# Altium PCB RA08B.PcbDoc
Units mm, origin at the board's own origin, x right, y up, seen from the top; angles counter-clockwise.
Board outline 43.18 x 24.13 mm, 2 copper layers (Top Layer, Bottom Layer), stack 1.021 mm thick; 22 components, 26 nets, 122 pads, 69 vias.
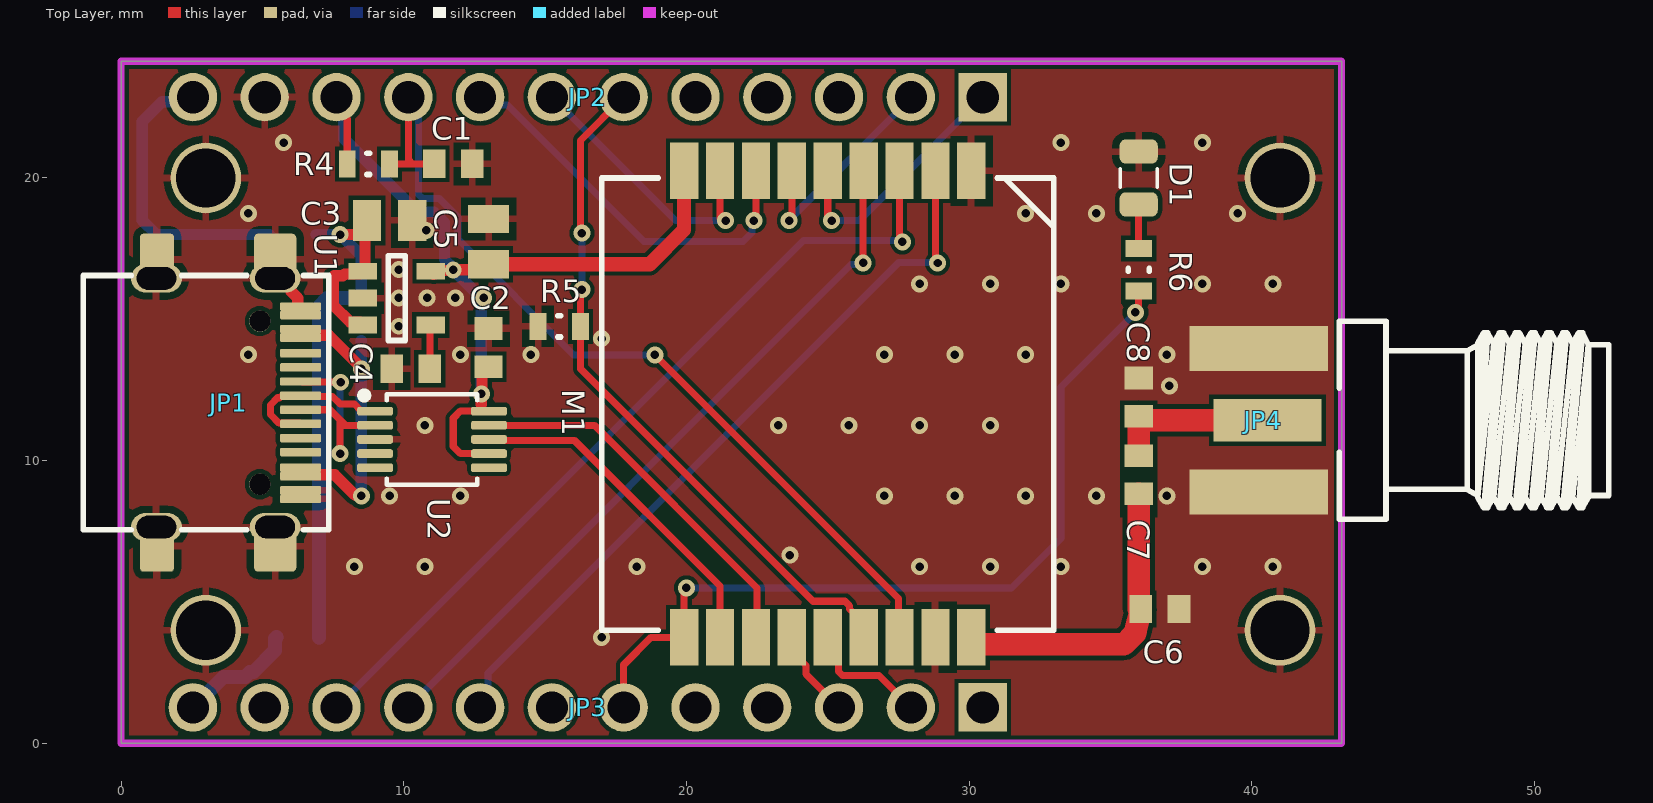
[diagram p0: Top Layer view]
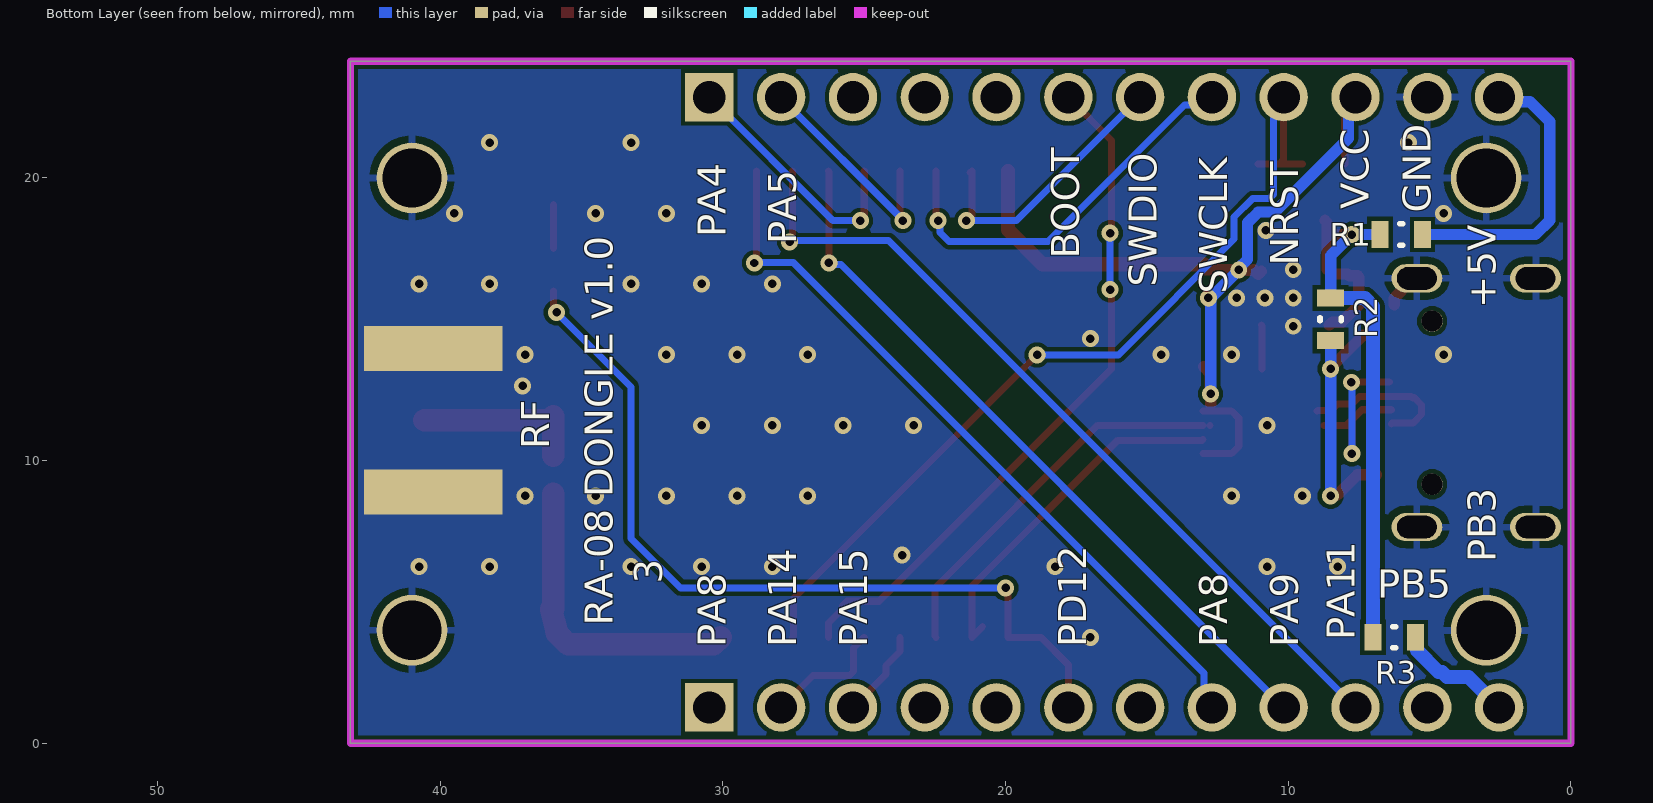
[diagram p1: Bottom Layer view, seen from below]
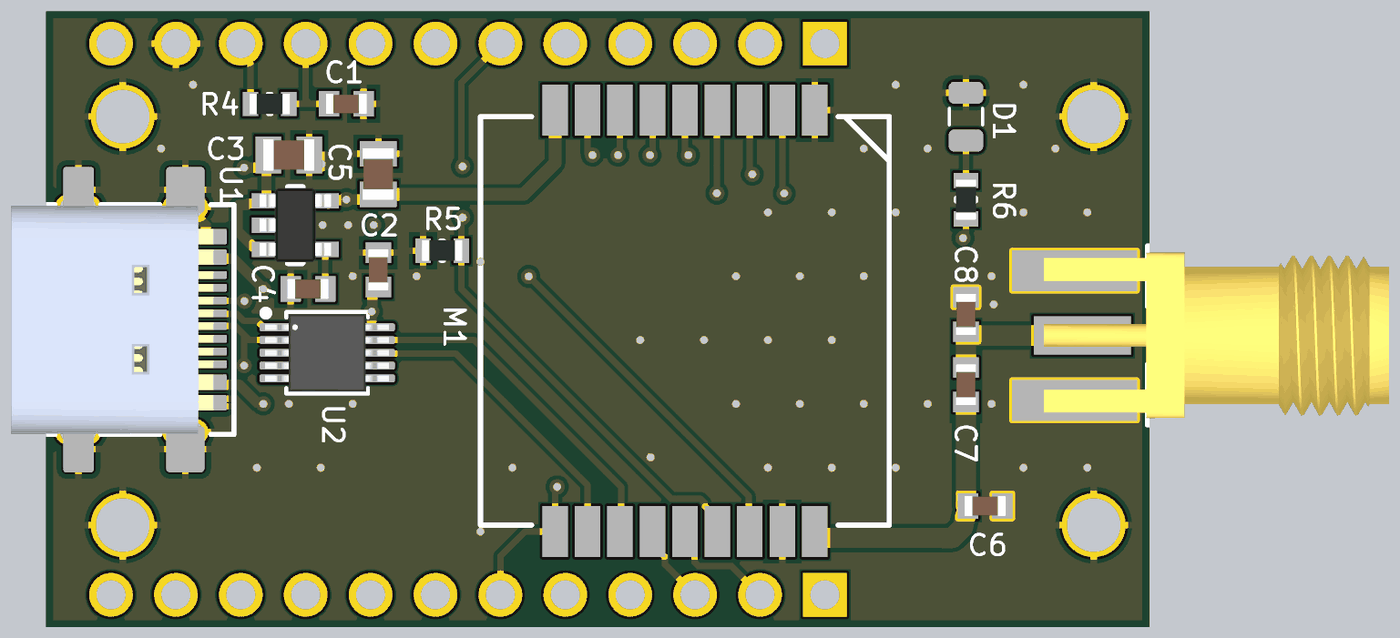
[diagram p2: 3D render of the assembled board from above, using the file's embedded part models]
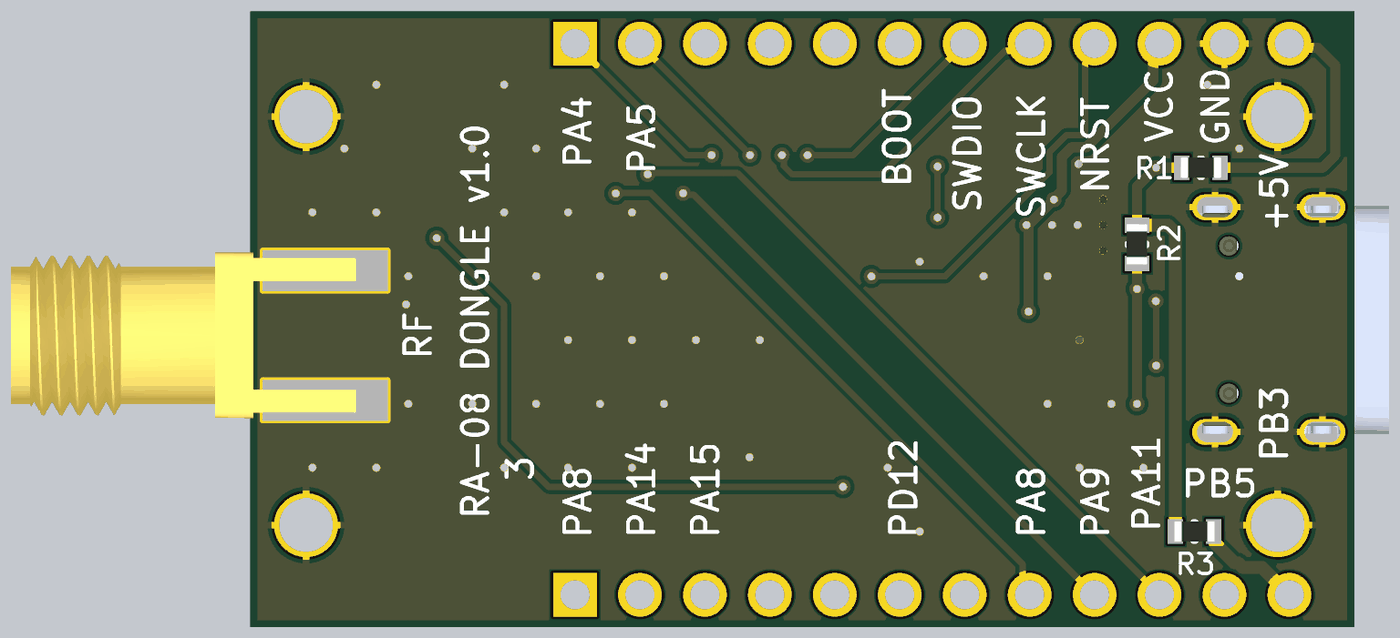
[diagram p3: 3D render of the assembled board from below, using the file's embedded part models]

## Layer stack, top to bottom
Top Solder: solder mask 0.01, Solder Resist, Dk 3.5
Top Layer: signal copper 0.0356
Dielectric 1: dielectric 0.95, FR-4, Dk 4.8
Bottom Layer: signal copper 0.0356
Bottom Solder: solder mask 0.01, Solder Resist, Dk 3.5

## Board outline
0,0 0,24.13 43.18,24.13 43.18,0

## Design rules (kind name [scope] priority, off if disabled: settings)
Clearance [All] p1: gap=0.15 ignorepadtopadclearanceinfootprint=FALSE
HoleSize [All] p1: absolutevalues=TRUE maxlimit=3 minlimit=0.025 maxpercent=80.000 minpercent=20.000
MinimumSolderMaskSliver [All] p1: minsoldermaskwidth=0.05
PolygonConnect PolygonConnect_1 [InComponent('C6') or InComponent('C8') or InComponent('JP4') vs IsNamedPolygon('GND_L01_P000') Or IsNamedPolygon('GND_L02_P001')] p1: connectstyle=Direct reliefconductorwidth=0.254 reliefentries=4 polygonreliefangle="90 Angle" airgapwidth=0.254
PolygonConnect [All] p2: thpad.connectstyle=Relief thpad.reliefconductorwidth=0.25 thpad.reliefentries=4 thpad.polygonreliefangle="90 Angle" thpad.airgapwidth=0.25 smdpad.connectstyle=Relief smdpad.reliefconductorwidth=0.25 smdpad.reliefentries=4 smdpad.polygonreliefangle="90 Angle" smdpad.airgapwidth=0.25 via.connectstyle=Direct via.reliefconductorwidth=0.254 via.reliefentries=4 via.polygonreliefangle="90 Angle" via.airgapwidth=0.254
RoutingVias [All] p1: holewidth=0.711 width=1.27 viastyle="Through Hole" minholewidth=0.711 minwidth=1.27 maxholewidth=0.711 maxwidth=1.27
SilkToSilkClearance [All] p1: silktosilkclearance=0.1
SilkToSolderMaskClearance [IsPad] p1: minsilkscreentomaskgap=0.1 clearancetoexposedcopper=TRUE
SolderMaskExpansion [All] p1: expansion=0.102 istentingtop=FALSE
Width [All] p1: maxlimit=2 minlimit=0.2 preferedwidth=0.25
26 further rules are at their usual default settings.

## Components (designator, comment, footprint, x,y, rotation, side; value= is the part's Value field where it differs from the comment)
C1 "100nF" C-0603 11.75,20.5 r180 top
C2 "100nF" C-0603 13,14 r270 top
C3 "10uF" C-0805 9.5,18.5 r0 top
C4 "nc" C-0603 10.25,13.25 r180 top
C5 "10uF" C-0805 13,17.75 r90 top
C6 "nc" C-0603 36.75,4.75 r180 top
C7 "100pF" C-0603 36,9.5 r90 top
C8 "nc" C-0603 36,12.25 r270 top
D1 "LED_1" LED_0805 36,20 r270 top
JP1 "L-KLS1-5473" USB_C_SMD_SLOT 6.35,12.05 r270 top
JP2 "HEADER 12" PLS1-12 30.48,22.86 r180 top locked
JP3 "HEADER 12" PLS1-12 30.48,1.27 r180 top locked
JP4 "EM-SA071-GGT" SMA_F_EDGE 41.825,11.43 r180 top
M1 "RA-08" LGA18_RA08 25,12 r270 top locked
R1 "0" R-0603 6,18 r0 bottom
R2 "nc" R-0603 8.5,15 r90 bottom
R3 "nc" R-0603 6.25,3.75 r180 bottom
R4 "10k" R-0603 8.75,20.5 r180 top
R5 "10k" R-0603 15.5,14.75 r0 top
R6 "470" R-0603 36,16.75 r270 top
U1 "LP5907MFX-3.0" SOT-23-5 9.75,15.75 r0 top
U2 "CH340E" MSOP-10 11,10.75 r270 top value={Value}

## Footprints (in the part's own frame and the unit in brackets; to place one, negate y for a bottom-side part, rotate by r counter-clockwise, add the part's x,y. Pads: shape width x height; smd on the part's side, far side on the other; paste and mask are expansions set on the pad)
C-0603 [mm] "Chip Capacitor, 2-Leads, Body 1,60x0,80mm, IPC Medium Density"
  rect 0.8x1 smd: 1(-0.675,0) 2(0.675,0)
  body extent -0.8,-0.4 0.8,0.4, height 0.8
C-0805 [mm] "Chip Capacitor, 2-Leads, Body 2,00x1,25mm, IPC Medium Density"
  rect 1x1.45 smd: 1(-0.8,0) 2(0.8,0)
  body extent -1,-0.62 1,0.63, height 1.25
LED_0805 [mm] "LED, Chip; 2.00 mm L X 1.25 mm W X 0.80 mm H body"
  rrect51% 0.86x1.35 smd: A(0.935,0) K(-0.935,0)
  silkscreen extent -0.33,-0.65 0.33,0.65, body extent -1,-0.63 1,0.63, height 0.25
LGA18_RA08 [mm]
  rect 2x1 smd: 1(-8.25,5.08) 2(-8.25,3.81) 3(-8.25,2.54) 4(-8.25,1.27) 5(-8.25,0) 6(-8.25,-1.27) 7(-8.25,-2.54) 8(-8.25,-3.81) 9(-8.25,-5.08) 10(8.25,-5.08) 11(8.25,-3.81) 12(8.25,-2.54) 13(8.25,-1.27) 14(8.25,0) 15(8.25,1.27) 16(8.25,2.54) 17(8.25,3.81) 18(8.25,5.08)
  silkscreen extent -8,-8 8,8, body extent -7.5,-7.5 7.5,7.53, height 1.5
MSOP-10 [mm] "Small Outline Pkg (SOP), 0.50 mm pitch; 10 pin, 3.00 mm L X 3.00 mm W X 1.10 mm H body"
  rrect52% 0.31x1.27 smd: 1(-1,-2.015) 2(-0.5,-2.015) 3(0,-2.015) 4(0.5,-2.015) 5(1,-2.015) 6(1,2.015) 7(0.5,2.015) 8(0,2.015) 9(-0.5,2.015) 10(-1,2.015)
  silkscreen extent -1.68,-2.52 1.6,1.6, body extent -1.5,-2.42 1.5,2.42, height 1.1
PLS1-12 [mm] "Header, Vertical, 2.54 mm pitch; 0.70 mm lead width, 10 pins, 1 row, 10 pins per row, 24.13 mm L X 2.54 mm W X 7.54 mm H body"
  rect 1.71x1.71 hole 1.14 paste-2539.97: 1(0,0)
  round 1.71 hole 1.14 paste-2539.97: 2(2.54,0) 3(5.08,0) 4(7.62,0) 5(10.16,0) 6(12.7,0) 7(15.24,0) 8(17.78,0) 9(20.32,0) 10(22.86,0) 11(25.4,0) 12(27.94,0)
R-0603 [mm] "Chip Resistor, 2-Leads, Body 1,60x0,82mm, IPC Medium Density"
  rect 0.6x0.95 smd: 1(-0.75,0) 2(0.75,0)
  silkscreen extent -0.05,-0.38 0.05,0.38, body extent -0.8,-0.4 0.8,0.4, height 0.45
SMA_F_EDGE [mm] "SMA End Launch Jack for 1.58mm PCB, 50 Ohm, Flat Tab Contact"
  rect 3.81x1.5 smd: 1(1.27,0)
  rect 4.9x1.6 smd: 2(1.575,2.54) 2(1.575,-2.54)
  rect 4.9x1.6 smd far side: 2(1.575,2.54) 2(1.575,-2.54)
  silkscreen extent -10.81,-3.5 -1.28,3.5, body extent -10.73,-3.25 2.77,3.25, height 3.7
SOT-23-5 [mm] "SOT23, 5-Leads, Body 2,90x2,45mm, Pitch 0,95mm, IPC Medium Density"
  rect 1x0.6 smd: 1(-1.2,0.95) 2(-1.2,0) 3(-1.2,-0.95) 4(1.2,-0.95) 5(1.2,0.95)
  silkscreen extent -0.3,-1.5 0.3,1.5, body extent -1.4,-1.45 1.4,1.45, height 1.55
USB_C_SMD_SLOT [mm] "USB 3.1 Type C"
  rrect20% 1.8x1.5 smd mask+0.07: 1(-5.08,-0.9) 1(5.08,-0.9)
  rrect20% 1.8x1.2 smd mask+0.07: 1(-5.08,-5.08) 1(5.08,-5.08)
  oval 1x1.8 hole 0.8 slot 1.4 at 90 deg: 1(-4.4,-0.9) 1(-4.4,-5.1) 1(4.4,-0.9) 1(4.4,-5.1)
  rrect30% 0.3x1.45 smd paste-2 mask+0.07: A1(-3.1,0) A4(-2.6,0) A9(2.6,0) A12(3.4,0) B1(3.1,0) B4(2.3,0) B9(-2.3,0) B12(-3.4,0)
  rrect30% 0.3x1.45 smd mask+0.07: A5(-1.25,0) A6(-0.25,0) A7(0.25,0) A8(1.25,0) B5(1.75,0) B6(0.75,0) B7(-0.75,0) B8(-1.75,0)
  round 0.75 hole 0.75 unplated paste-2539.97 mask+0.07: MH(-2.885,-1.44) MH(2.885,-1.44)
  silkscreen extent -4.5,-7.69 4.5,1, body extent -4.47,-7.7 4.47,0.2, height 3.2

## Part data
C1 C2 C3 C4 C5 C6 C7 C8: library part CAPN, Voltage=50V, Вид=Конденсатор, Точність/група=NP0
JP4: library part SMA, "SMA Female R/A PCB Mount", Вид=Роз'єм
R1 R2 R3 R4 R5 R6: library part RES, Вид=Резистор, Точність/група=5%
U1: library part LP5907, "250mA Low-Dropout Regulator", Вид=Мікросхема
D1: Вид=Світлодіод
JP1 U2: Mounting  Method=SMD
JP2 JP3: Вид=Роз'єм

## Free pads (board coordinates)
  round 2.5 hole 2.1: 1(3,4) 1(3,20) 1(41,4) 1(41,20)

## Via types
v1: diameter 0.6, hole 0.3, Top Layer to Bottom Layer, tented both sides, 69 vias

## Nets (pads, with @x,y where several pads share a name; then routed paths per layer and width w, separated by ;. In a path a pad name is that pad's centre, name@x,y a point inside that pad or via, vN(x,y) a via of type N, cw(c..) or ccw(c..) an arc to the next point about the centre after c; other vN are vias at no path point)
+5V: JP2.12 R1.1 | length 10.4
  Bottom Layer w0.4: JP2.12 2.376,22.696 1.446,22.696 0.75,22 0.75,18.5 1.25,18 R1.1
BOOT: JP2.6 M1.15 R5.2 | length 24.6
  Top Layer w0.25: v1@16.25,16 R5.2 16.25,13.25 24.475,5.025 25.614,5.025 25.775,4.864 25.775,4.745 26.27,4.25 M1.15 ; v1@16.25,18 16.25,21.33 JP2.6
  Bottom Layer w0.25: v1(16.3,16.047) v1(16.3,18.047)
DN: JP1.A7 JP1.B7 U2.2 | length 7.7
  Top Layer w0.25: JP1.A7 7.384,11.8 7.75,11.434 ; JP1.B7@6.425,12.775 6.436,12.786 7.749,12.786 v1(7.763,12.773) ; v1(7.75,10.25) 7.75,11.434 ; 7.896,11.25 7.934,11.25 ; U2.2@8.735,11.25 7.934,11.25 ; 7.75,11.434 7.934,11.25
  Bottom Layer w0.25: v1(7.75,10.25) 7.75,12.76 v1(7.763,12.773)
DP: JP1.A6 JP1.B6 U2.1 | length 5.6
  Top Layer w0.25: JP1.B6 6.325,11.325 5.587,11.325 5.279,11.634 5.279,11.966 5.537,12.225 5.604,12.225 5.654,12.275 6.35,12.275 7.475,12.275 7.75,12 8.255,12 8.475,11.78 8.955,11.78 U2.1
GND: C1.1 C2.1 C3.2 C4.2 C5.2 C6.1 C8.1 D1.K JP1.1 JP1.A1 JP1.A12 JP1.B1 JP1.B12 JP2.11 JP4.2 M1.1 M1.17 pad.1 R5.1 U1.2 U2.3 | length 0.6
  Top Layer w0.4: JP1.1@6,16 6.25,15.75 JP1.B12@6.25,15.516
  other v1: 17,3.75 8.25,6.25 10.75,6.25 18.25,6.25 28.25,6.25 30.75,6.25 33.25,6.25 38.25,6.25 40.75,6.25 23.657,6.657 9.5,8.75 12,8.75 27,8.75 29.5,8.75 32,8.75 34.5,8.75 37,8.75 10.75,11.25 23.25,11.25 25.75,11.25 28.25,11.25 30.75,11.25 37.084,12.645 4.5,13.75 12,13.75 14.5,13.75 27,13.75 29.5,13.75 32,13.75 37,13.75 17,14.318 9.822,14.755 9.822,15.755 10.822,15.755 11.822,15.755 28.25,16.25 30.75,16.25 33.25,16.25 38.25,16.25 40.75,16.25 9.822,16.755 10.788,18.149 4.5,18.75 32,18.75 34.5,18.75 39.5,18.75 5.75,21.25 33.25,21.25 38.25,21.25
LED: JP3.6 M1.10 R6.2 | length 29.6
  Top Layer w0.25: JP3.6 17.78,2.78 18.75,3.75 M1.10 19.92,5.42 v1(20,5.5) ; v1@36,15.25 R6.2
  Bottom Layer w0.25: v1(20,5.5) 31.5,5.5 33.25,7.25 33.25,12.606 v1(35.886,15.243)
NetC4_1: C4.1 U1.4 | length 1.6
  Top Layer w0.25: C4.1 10.925,14.775 U1.4
NetC6_2: C6.2 C7.1 M1.18 | length 11.1
  Top Layer w0.8: M1.18 30.096,3.734 30.33,3.5 35.093,3.5 ccw(c35.334,4.005) 35.096,3.498 35.144,3.498 35.476,3.498 35.709,3.732 ; 35.71,3.733 35.87,3.892 35.893,3.968 ccw(c35.334,4.005) 35.893,3.972 35.894,3.992 36.074,4.747 C6.2 C6.2@36.075,4.702 ; C6.2@36,4.75 C7.1
NetC7_2: C7.2 C8.2 JP4.1 | length 6
  Top Layer w0.25: C8.2 C8.2@36.145,11.43
  Top Layer w0.8: C7.2 C8.2 ; C8.2@36.145,11.43 JP4.1
NetD1_A: D1.A R6.1 | length 1.6
  Top Layer w0.25: R6.1 D1.A
NetJP3_12: JP3.12 R3.2 | length 4.5
  Top Layer w0.5: JP3.12 JP3.12@2.845,1.27
  Bottom Layer w0.5: JP3.12 3.62,2.35 4.385,2.35 4.56,2.525 4.682,2.525 5.45,3.293 5.45,3.7 R3.2
NRST: C1.2 JP2.9 M1.16 R4.1 | length 32.3
  Top Layer w0.25: R4.1 10.306,20.5 ; JP2.9 10.16,20.646 10.306,20.5 ; C1.2 10.306,20.5 ; v1(18.886,13.743) 27.5,5.129 27.5,3.79 M1.16
  Bottom Layer w0.25: JP2.9 10.16,22.465 10.525,22.1 10.525,19.42 10.671,19.274 11.254,19.274 11.913,18.615 11.913,17.837 16.007,13.743 v1(18.886,13.743)
PA4: JP2.1 M1.5 | length 8.9
  Top Layer w0.25: v1@25,18.5 M1.5
  Bottom Layer w0.25: v1(25.136,18.493) 26.113,18.493 JP2.1
PA5: JP2.2 M1.6 | length 7.9
  Top Layer w0.25: M1.6 23.73,18.52 v1@23.75,18.5
  Bottom Layer w0.25: v1(23.636,18.493) 23.636,18.524 27.94,22.828 JP2.2
PA8: JP3.8 M1.2 | length 26.4
  Top Layer w0.25: v1@28.81,17 M1.2
  Bottom Layer w0.25: JP3.8 12.979,1.549 12.979,2.479 27.511,17.011 28.739,17.011 v1@28.75,17
  other v1: 28.886,16.993
PA9: JP3.9 M1.4 | length 25.9
  Top Layer w0.25: v1(26.25,17) 26.25,20.23 M1.4
  Bottom Layer w0.25: JP3.9 25.823,16.933 26.183,16.933 v1(26.25,17)
PA11: JP3.10 M1.3 | length 29.2
  Top Layer w0.25: v1@27.54,17.79 M1.3
  Bottom Layer w0.25: JP3.10 24.14,17.79 v1@27.561,17.79
  other v1: 27.636,17.743
PA14: JP3.2 M1.14 | length 4.5
  Top Layer w0.25: M1.14 25.375,3.375 25.375,2.546 25.521,2.4 26.81,2.4 JP3.2
PA15: JP3.3 M1.13 | length 3.2
  Top Layer w0.25: M1.13 23.73,3.25 24.225,2.755 24.225,2.445 JP3.3
RXD1: M1.11 U2.8 | length 12.7
  Top Layer w0.25: U2.8 13.045,10.72 16.03,10.72 21.19,5.56 M1.11 M1.11@20.815,4.125
SWCLK: JP2.8 M1.7 | length 14.3
  Top Layer w0.25: JP2.8 JP2.8@12.9,22.86 ; M1.7 22.46,18.54 v1@22.5,18.5
  Bottom Layer w0.25: JP2.8 12.979,22.581 13.669,22.581 18.5,17.75 22,17.75 22.319,18.069 22.319,18.426 v1(22.386,18.493)
SWDIO: JP2.7 M1.8 | length 9.8
  Top Layer w0.25: v1@21.25,18.5 21.19,18.56 M1.8 M1.8@21.25,20.19
  Bottom Layer w0.25: JP2.7 19.607,18.493 v1(21.386,18.493)
TXD1: M1.12 U2.9 | length 13.6
  Top Layer w0.25: U2.9 16.75,11.25 22.5,5.5 22.5,3.79 M1.12
V_IN: C3.1 R1.2 R2.2 R3.1 U1.1 U1.3 | length 22.8
  Top Layer w0.4: v1(7.75,18) C3.1@8.625,18 ; U1.3 8.45,14.9 8.105,14.9 7.5,15.505 7.5,16.5 7.538,16.538 7.842,16.538 7.904,16.6 8.45,16.6 U1.1 ; U1.1@8.625,16.775 C3.1@8.625,18 ; C3.1 8.625,18.425 C3.1@8.625,18
  Bottom Layer w0.4: R1.2@6.9,18 v1(7.75,18) 8.5,17.25 R2.2
  Bottom Layer w0.5: R3.1 7,15.457 7.293,15.75 R2.2
VBUS: JP1.A4 JP1.A9 JP1.B4 JP1.B9 R2.1 | length 9.4
  Top Layer w0.4: JP1.A9@6.875,9.5 7.554,9.5 8.266,8.788 8.462,8.788 v1(8.5,8.75) ; JP1.B9@7.002,14.432 7.35,14.432 8.5,13.282 v1(8.5,13.25)
  Bottom Layer w0.4: v1(8.5,8.75) 8.5,10.6 v1(8.5,13.25) R2.1
VCC: C2.2 C5.1 JP2.10 M1.9 R4.2 U1.5 U2.7 U2.10 | length 32.3
  Top Layer w0.25: JP2.10 7.62,22.465 8,22.085 8,21.984 R4.2 ; U2.7 12,10.25 11.75,10.5 11.75,11.5 12,11.75 U2.10
  Top Layer w0.4: U1.5 11.059,16.591 11.219,16.75 11.244,16.725 11.725,16.725 v1(11.75,16.75) C5.1@13,16.75 ; 12.743,12 v1(12.743,12.364) ; v1@12.765,12.364 12.765,13.09 C2.2
  Top Layer w0.5: C5.1 18.7,16.95 19.92,18.17 M1.9
  Bottom Layer w0.4: JP2.10 7.868,22.612 7.868,21.405 10.475,18.799 11.057,18.799 11.438,18.418 11.438,17.116 11.75,16.804 v1(11.75,16.75) 12.743,15.757 v1(12.743,12.364)
  other v1: 12.822,15.755
pads on no net: JP1.A5 JP1.A8 JP1.B5 JP1.B8 JP1.MH JP2.3 JP2.4 JP2.5 JP3.1 JP3.4 JP3.5 JP3.7 JP3.11 U2.4 U2.5 U2.6

## Polygon pours and split planes (outlines as drawn)
GND on Top Layer "GND_L01_P000" (solid, remove dead copper, pour order 0): 0,0 0,24 43.25,24 43.25,0
GND on Bottom Layer "GND_L02_P001" (solid, remove dead copper, pour order 1): 0,0 0,24 43.25,24 43.25,0

## Keep-outs
Keep-Out Layer:
  the board outline again, w0.254

## Other copper
Top Layer:
  pour cut-out: 35.35,11.43 35.35,8 36.65,8 36.65,11.43

## Silkscreen, mask and mechanical layers (free items; w line width, h text height)
Bottom Overlay:
  text "VCC" at 7.15,18.9 h1 r270
  text "GND" at 4.95,18.775 h1 r270
  text "PA4" at 29.9,17.9 h1 r270
  text "PA5" at 27.4,17.65 h1 r270
  text "BOOT" at 17.4,17.15 h1 r270
  text "NRST" at 9.65,16.9 h1 r270
  text "SWDIO" at 14.65,16.15 h1 r270
  text "SWCLK" at 12.15,15.9 h1 r270
  text "+5V" at 2.65,15.4 h1 r270
  text "RF" at 36.15,10.4 h1 r270
  text "PB3" at 2.65,6.4 h1 r270
  text "3" at 32.15,5.65 h1 r270
  text "PB5" at 6.85,5.15 h1
  text "RA-08 DONGLE v1.0" at 33.9,4.15 h1 r270
  text "PA11" at 7.65,3.65 h1 r270
  text "PA9" at 9.65,3.4 h1 r270
  text "PA8" at 12.15,3.4 h1 r270
  text "PD12" at 17.15,3.4 h1 r270
  text "PA15" at 24.9,3.4 h1 r270
  text "PA14" at 27.4,3.4 h1 r270
  text "PA8" at 29.9,3.4 h1 r270

## Dimensions
0,0 to 0,24.13 on Mechanical 1
0,0 to 43.18,0 on Mechanical 1